# EAGLE board EKG-PreAmp (EAGLE 5.09)
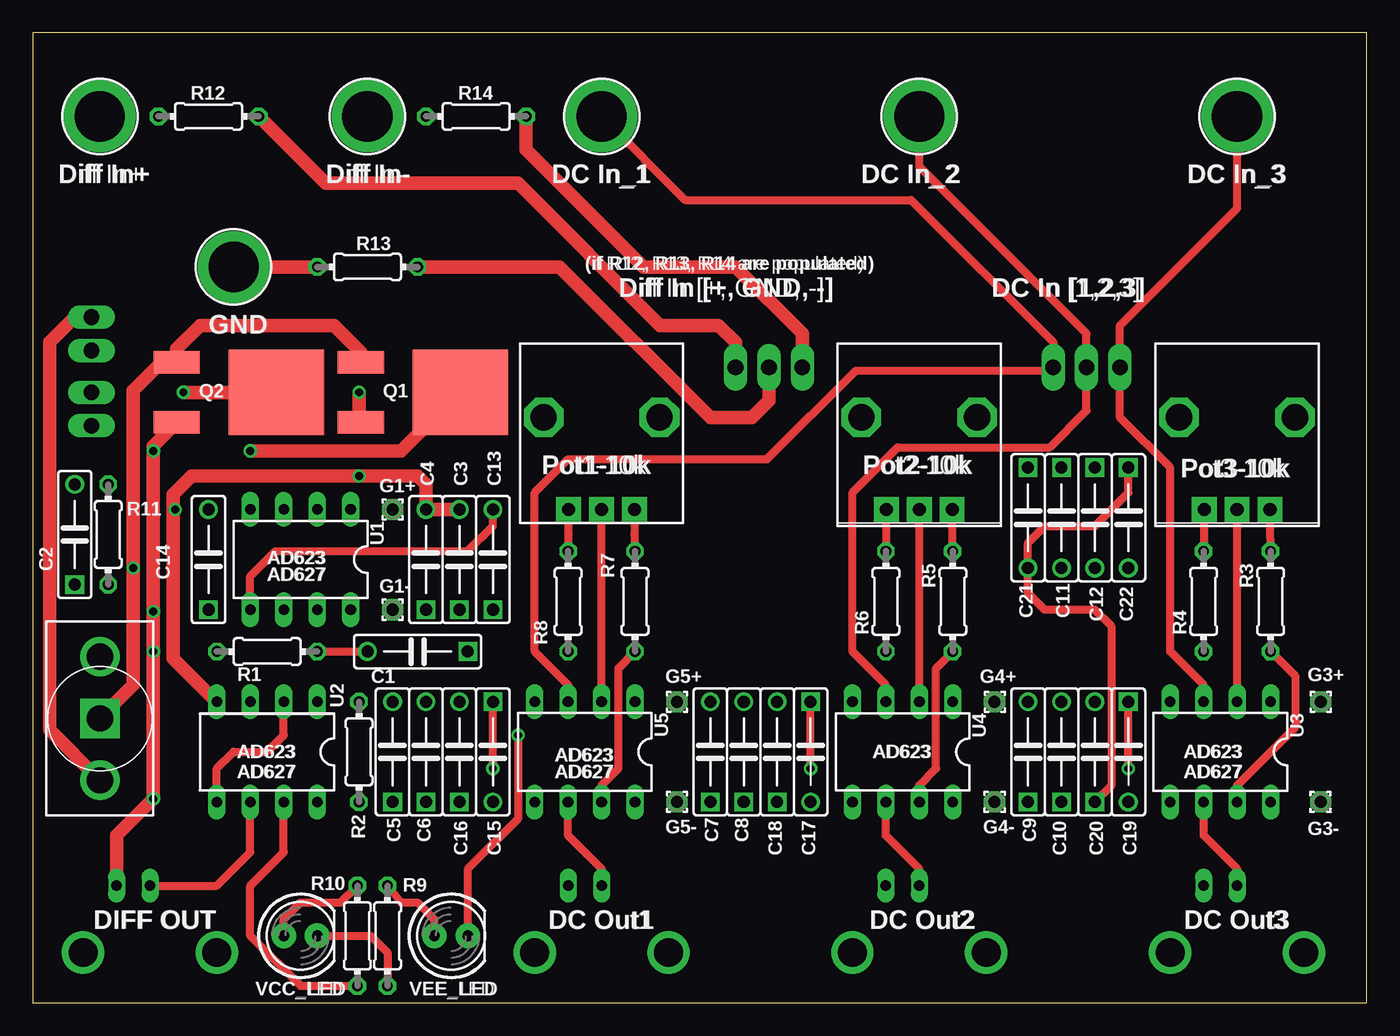
[diagram p0: board, top side]
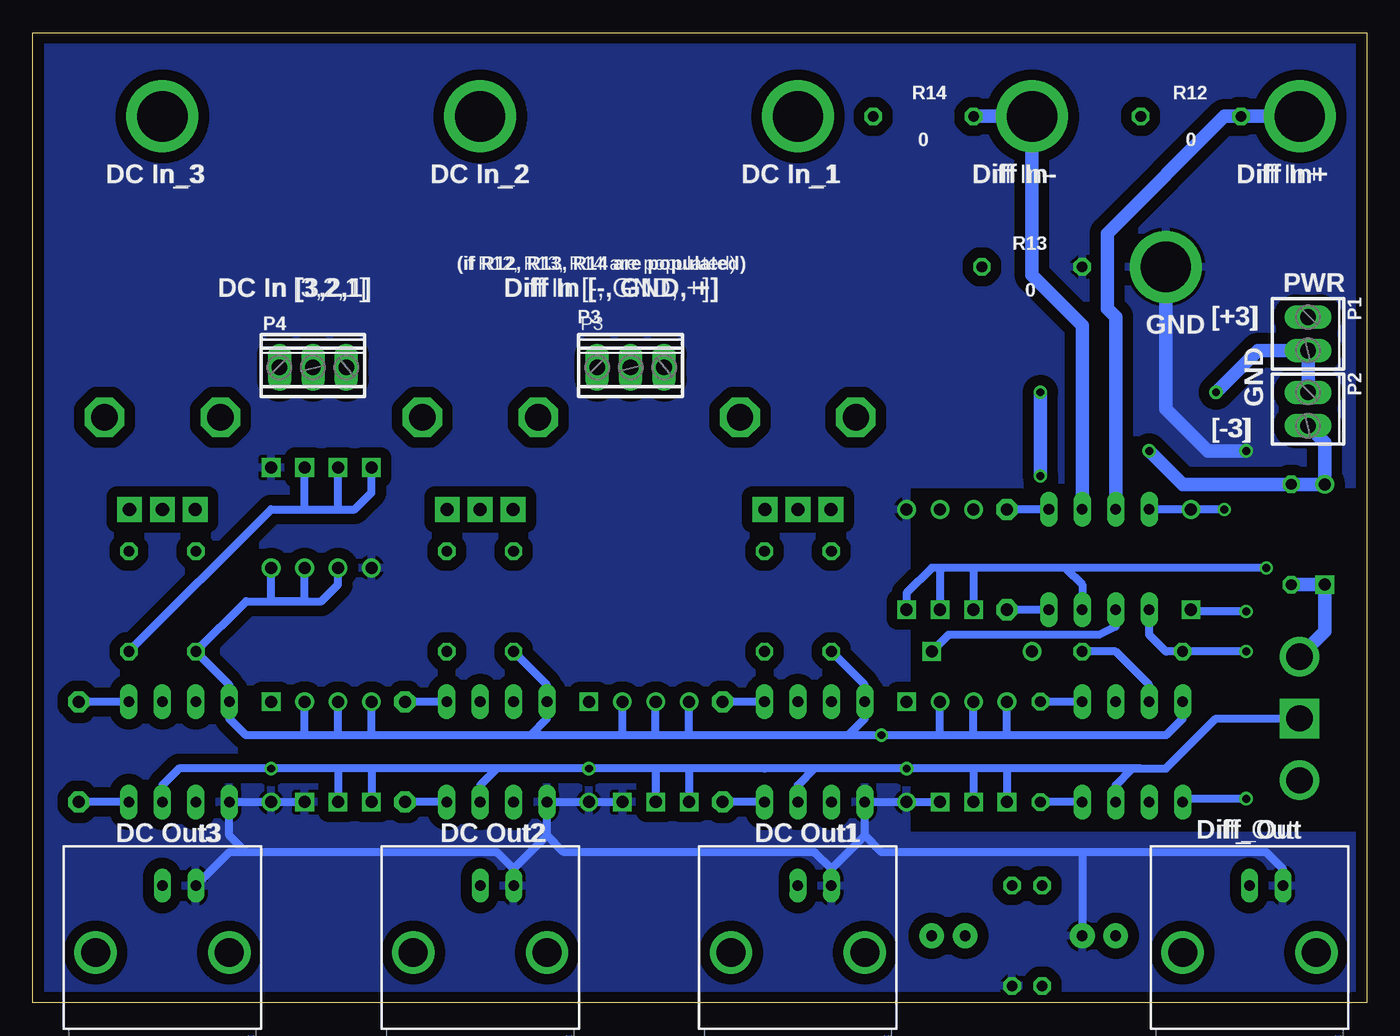
[diagram p1: board, bottom side, seen from below]

Size 101.27 x 73.65 mm. Coordinates in mm from the lower left corner, seen from the top.
Outline: 0,0 101.27,0 101.27,73.65 0,73.65 0,0
Copper layers (1*16): Top 0.0356mm / dielectric 1.5011mm / Bottom 0.0356mm
Design rules "std4pcb": minimum track width 6mil, minimum drill 10mil, track to track 8mil, track to pad 8mil, pad to pad 8mil, via to via 8mil, smd to smd 8mil, copper to edge 15mil, drill to drill 10mil, minimum pad ring 10mil, minimum via ring 8mil, stop-mask expansion 4mil, vias tented up to drill 0mil, thermal gap 10mil

## Footprints (pad centres in the part's own frame; a part is rotated, then mirrored left to right if it is on the bottom)
BNC = drill 2.2 round: 3 -5.08,5.08; 4 5.08,5.08 | drill 0.8 long: GND -2.54,0; S 0,0
BANANA_CONN = drill 3.81 pad 5.461 round: P$1 0,0
C-AXIAL = drill 0.914 square: 1 -3.81,0 | drill 0.914 round: 2 3.81,0
1,6/0,9 = drill 0.914 pad 1.6 octagon: 1 0,0
2POL254 = drill 1.2 long: 1 -1.27,0; 2 1.27,0
3POL254 = drill 1.2 long: 1 -2.54,0; 2 0,0; 3 2.54,0
ALPS_POT = drill 1 pad 1.88 square: P$1 7,-2.5; P$2 7,0; P$3 7,2.5 | drill 2 octagon: P$4 0,-4.4; P$5 0,4.4
TO-252 = smd 6.5 x 7.25: D 0,7.05 | smd 1.7 x 3.5: G -2.286,-0.5; S 2.286,-0.5
R-AXIAL = drill 0.813 octagon: 1 -2.54,0; 2 5.08,0
NKK-M2012SS1G03 = drill 2 square: P$1 0,0 | drill 2 round: P$2 -4.699,0; P$3 4.699,0
DIL08 = drill 0.813 long: 1 -3.81,-3.81; 2 -1.27,-3.81; 3 1.27,-3.81; 4 3.81,-3.81; 5 3.81,3.81; 6 1.27,3.81; 7 -1.27,3.81; 8 -3.81,3.81
LED5MM = drill 0.813 pad 1.88 round: A -1.27,0; K 1.27,0

## Placement (x,y rotation side)
BNC1  BNCPTH  [BNC]  8.89,8.89 180 bottom
BNC2  BNCPTH  [BNC]  91.44,8.89 180 bottom
BNC3  BNCPTH  [BNC]  67.31,8.89 180 bottom
BNC4  BNCPTH  [BNC]  43.18,8.89 180 bottom
BP1  BANANA_CONN  [BANANA_CONN]  25.4,67.31 0 top
BP2  BANANA_CONN  [BANANA_CONN]  5.08,67.31 0 top
BP3  BANANA_CONN  [BANANA_CONN]  15.24,55.88 0 top
BP4  BANANA_CONN  [BANANA_CONN]  91.44,67.31 270 top
BP5  BANANA_CONN  [BANANA_CONN]  67.31,67.31 270 top
BP6  BANANA_CONN  [BANANA_CONN]  43.18,67.31 270 top
C1  >= 1uF  [C-AXIAL]  29.21,26.67 180 top
C2  DNI  [C-AXIAL]  3.17,35.56 90 top
C3  .47uF  [C-AXIAL]  32.38,33.66 90 top
C4  .1uF  [C-AXIAL]  29.84,33.66 90 top
C5  .47uF  [C-AXIAL]  27.3,19.05 90 top
C6  .1uF  [C-AXIAL]  29.84,19.05 90 top
C7  .47uF  [C-AXIAL]  51.44,19.05 90 top
C8  .1uF  [C-AXIAL]  53.98,19.05 90 top
C9  .47uF  [C-AXIAL]  75.56,19.05 90 top
C10  .1uF  [C-AXIAL]  78.11,19.05 90 top
C11  .47uF  [C-AXIAL]  78.11,36.83 270 top
C12  .1uF  [C-AXIAL]  80.64,36.83 270 top
C13  .1uF  [C-AXIAL]  34.92,33.66 90 top
C14  .47uF  [C-AXIAL]  13.34,33.66 90 top
C15  .47uF  [C-AXIAL]  34.92,19.05 270 top
C16  .1uF  [C-AXIAL]  32.38,19.05 90 top
C17  .1uF  [C-AXIAL]  59.05,19.05 270 top
C18  .47uF  [C-AXIAL]  56.52,19.05 90 top
C19  .47uF  [C-AXIAL]  83.19,19.05 270 top
C20  1uF  [C-AXIAL]  80.64,19.05 90 top
C21  .1uF  [C-AXIAL]  75.56,36.83 270 top
C22  1uF  [C-AXIAL]  83.19,36.83 270 top
G1+  [1,6/0,9]  27.3,37.47 270 top
G1-  [1,6/0,9]  27.3,29.84 270 top
G3+  [1,6/0,9]  97.79,22.86 270 top
G3-  [1,6/0,9]  97.79,15.24 270 top
G4+  [1,6/0,9]  73.03,22.86 270 top
G4-  [1,6/0,9]  73.03,15.24 270 top
G5+  [1,6/0,9]  48.9,22.86 270 top
G5-  [1,6/0,9]  48.9,15.24 270 top
P1  [2POL254]  4.45,50.8 270 bottom
P2  [2POL254]  4.45,45.09 270 bottom
P3  [3POL254]  55.88,48.26 0 bottom
P4  [3POL254]  80.01,48.26 0 bottom
POT1  10k  [ALPS_POT]  91.44,44.45 270 top
POT2  10k  [ALPS_POT]  67.31,44.45 270 top
POT3  10k  [ALPS_POT]  43.18,44.45 270 top
Q1  AOD4102  [TO-252]  25.4,46.35 270 top
Q2  AOD4102  [TO-252]  11.43,46.35 270 top
R1  2M  [R-AXIAL]  16.51,26.67 0 top
R2  TBD  [R-AXIAL]  24.77,17.78 90 top
R3  43k  [R-AXIAL]  93.98,31.75 270 top
R4  43k  [R-AXIAL]  88.9,29.21 90 top
R5  43k  [R-AXIAL]  69.85,31.75 270 top
R6  43k  [R-AXIAL]  64.77,29.21 90 top
R7  43k  [R-AXIAL]  45.72,31.75 270 top
R8  43k  [R-AXIAL]  40.64,29.21 90 top
R9  300  [R-AXIAL]  26.92,6.35 270 top
R10  300  [R-AXIAL]  24.64,6.35 270 top
R11  DNI  [R-AXIAL]  5.71,36.83 270 top
R12  0  [R-AXIAL]  14.61,67.31 180 top
R13  0  [R-AXIAL]  26.67,55.88 180 top
R14  0  [R-AXIAL]  34.92,67.31 180 top
S2  [NKK-M2012SS1G03]  5.08,21.59 90 top
U1  AD621  [DIL08]  20.32,33.66 180 top
U2  AD621  [DIL08]  17.78,19.05 180 top
U3  AD621  [DIL08]  90.17,19.05 180 top
U4  AD621  [DIL08]  66.04,19.05 180 top
U5  AD621  [DIL08]  41.91,19.05 180 top
VCC_LED  [LED5MM]  20.32,5.08 0 top
VEE_LED  [LED5MM]  31.75,5.08 0 top

## Library data of the parts
BNC1-BNC4 BP1-BP6 C1-C22 G1+ G1- G3+ G3- G4+ G4- G5+ G5- P1-P4 POT1-POT3 Q1 Q2 R1-R14 S2 U1-U5 VCC_LED VEE_LED = parts

## Nets
+3V: P1.1 S2.P$2
-3V: C2.2 P2.2 Q1.D R11.1
DC1: BP4.P$1 P4.1 U3.3
DC2: BP5.P$1 P4.2 U4.3
DC3: BP6.P$1 P4.3 U5.3
DIFF+: BP2.P$1 R12.2 U1.3
DIFF-: BP1.P$1 R14.2 U1.2
GND: BNC1.GND BNC2.GND BNC3.GND BNC4.GND BP3.P$1 C13.2 C14.1 C15.2 C16.1 C17.2 C18.1 C19.2 C20.1 C21.2 C22.1 Q2.S R1.1 R9.2 R13.2 U1.5 U2.2 U2.5 U3.5 U4.5 U5.5 VCC_LED.K
N$1: P3.3 R12.1
N$2: R2.1 U2.8
N$3: G1+.1 U1.1
N$4: G1-.1 U1.8
N$5: P3.2 R13.1
N$6: P3.1 R14.1
N$7: G3+.1 U3.1
N$8: G3-.1 U3.8
N$10: POT1.P$3 R3.1
N$11: POT1.P$1 R4.2
N$12: POT1.P$2 U3.2
N$13: BNC2.S U3.6
N$14: C1.1 U1.6
N$15: C2.1 R11.2 S2.P$3
N$18: R9.1 VEE_LED.A
N$19: BNC1.S U2.6
N$20: R10.1 VCC_LED.A
N$22: G4+.1 U4.1
N$23: G4-.1 U4.8
N$24: POT2.P$3 R5.1
N$25: POT2.P$1 R6.2
N$27: POT2.P$2 U4.2
N$28: BNC3.S U4.6
N$31: G5+.1 U5.1
N$32: G5-.1 U5.8
N$33: POT3.P$3 R7.1
N$34: POT3.P$1 R8.2
N$36: POT3.P$2 U5.2
N$37: BNC4.S U5.6
N$38: C1.2 R1.2 U2.3
NEUTRAL: P1.2 P2.1 Q2.D
R97: R2.2 U2.1
VCC: C3.1 C4.1 C5.1 C6.1 C7.1 C8.1 C9.1 C10.1 C11.1 C12.1 C13.1 C15.1 C17.1 C19.1 C21.1 Q1.G Q2.G R3.2 R5.2 R7.2 R10.2 S2.P$1 U1.7 U2.7 U3.7 U4.7 U5.7
VEE: C3.2 C4.2 C5.2 C6.2 C7.2 C8.2 C9.2 C10.2 C11.2 C12.2 C14.2 C16.2 C18.2 C20.2 C22.2 Q1.S R4.1 R6.1 R8.1 U1.4 U2.4 U3.4 U4.4 U5.4 VEE_LED.K

## Tracks (layer width: path | path; a pad name or v marks a point on that pad's centre or on a via)
+3V
  Top 1.016: P1.1 3.17,52.07 1.27,50.16 1.27,20.7 S2.P$2
-3V  (via drill 0.6)
  Top 1.016: Q1.D 32.38,46.35 27.94,41.91 v16.51,41.91
  Bottom 1.016: P2.2 3.17,42.55 C2.2 R11.1 13.97,39.37 v16.51,41.91
DC1
  Top 0.61: U3.3 88.9,24.13 86.36,26.67 86.36,40.64 82.55,44.45 P4.1 82.55,51.44 91.44,60.33 BP4.P$1
DC2
  Top 0.61: U4.3 64.77,24.13 62.23,26.67 62.23,38.73 65.66,42.16 77.22,42.16 80.01,44.96 P4.2 80.01,50.8 67.31,63.5 BP5.P$1
DC3
  Top 0.61: U5.3 40.64,24.13 38.1,26.67 38.1,38.73 40.64,41.27 55.75,41.27 62.48,48.01 77.22,48.01 P4.3 77.47,50.16 66.67,60.96 49.53,60.96 BP6.P$1
DIFF+
  Bottom 1.016: BP2.P$1 R12.2 10.79,67.31 19.68,58.42 19.68,52.7 19.05,52.07 U1.3
DIFF-
  Bottom 1.016: U1.2 21.59,51.44 25.4,55.24 BP1.P$1 R14.2
GND  (via drill 0.6)
  Top 0.61: VCC_LED.K 25.65,5.08 26.92,3.81 R9.2 | U2.2 19.05,20.32 17.78,19.05 15.24,19.05 13.97,17.78 U2.5 | U1.5 16.51,32.38 18.41,34.29 33.02,34.29 34.92,36.2 C13.2 | C22.1 83.19,38.73 80.64,36.2 76.83,36.2 75.56,34.92 C21.2 75.56,31.11 76.83,29.84 80.64,29.84 81.92,28.57 81.92,16.51 C20.1
  Top 1.016: Q2.S 10.41,44.07 | Q2.S 11.18,44.07 11.43,43.81 | BNC1.GND 6.35,12.7 v9.14,15.49 v9.14,26.67 v9.14,29.72 v9.14,41.91 9.14,42.28 Q2.S | BP3.P$1 R13.2
  Bottom 0.61: 64.77,10.16 BNC3.GND | 64.77,10.16 66.04,11.43 85.09,11.43 | 85.09,11.43 86.36,12.7 U3.5 C19.2 C20.1 | 40.64,10.16 41.91,11.43 60.96,11.43 62.23,12.7 | 62.23,12.7 U4.5 C17.2 C18.1 | U1.5 16.51,27.94 15.24,26.67 R1.1 v9.14,26.67 | BNC2.GND 86.36,11.43 85.09,11.43 | 62.23,12.7 64.77,10.16 | 40.64,10.16 BNC4.GND | 38.1,12.7 40.64,10.16 | 38.1,12.7 36.83,11.43 21.59,11.43 | BNC1.GND 6.35,10.16 7.62,11.43 21.59,11.43 | 21.59,11.43 VCC_LED.K | v9.14,29.72 13.21,29.72 C14.1 | 38.1,12.7 U5.5 C15.2 C16.1 | v9.14,15.49 13.72,15.49 U2.5
  Bottom 1.016: v9.14,41.91 12.06,41.91 15.24,45.09 BP3.P$1
  pour Bottom (isolate 0.813): 0.64,0.64 100.33,0.64 100.33,73.03 0.64,73.03 0.64,53.98 0.64,39.37 34.92,39.37 34.92,12.7 0.64,12.7
N$1
  Top 1.016: R12.1 22.23,62.23 36.83,62.23 47.62,51.44 52.07,51.44 53.34,50.16 P3.3
N$2
  Bottom 0.61: U2.8 R2.1
N$3
  Bottom 0.61: U1.1 G1+.1
N$4
  Bottom 0.61: U1.8 G1-.1
N$5
  Top 1.016: R13.1 40.01,55.88 51.44,44.45 54.61,44.45 55.88,45.72 P3.2
N$6
  Top 1.016: R14.1 37.47,64.77 46.35,55.88 53.34,55.88 58.42,50.8 P3.1
N$7
  Bottom 0.61: U3.1 G3+.1
N$8
  Bottom 0.61: U3.8 G3-.1
N$10
  Top 0.61: POT1.P$3 93.94,35.56 R3.1
N$11
  Top 0.61: POT1.P$1 88.94,35.56 R4.2
N$12
  Top 0.61: U3.2 POT1.P$2
N$13
  Top 0.61: BNC2.S 91.44,10.16 88.9,12.7 U3.6
N$14
  Bottom 0.61: U1.6 19.05,28.57 20.32,27.94 31.75,27.94 C1.1
N$15
  Bottom 1.016: R11.2 C2.1 3.17,28.19 S2.P$3
N$18
  Top 0.61: R9.1 27.94,7.62 29.21,7.62 30.48,6.35 VEE_LED.A
N$19
  Top 0.61: BNC1.S 13.97,8.89 16.51,11.43 U2.6
N$20
  Top 0.61: VCC_LED.A 19.05,6.35 20.32,7.62 23.37,7.62 R10.1
N$22
  Bottom 0.61: U4.1 G4+.1
N$23
  Bottom 0.61: U4.8 G4-.1
N$24
  Top 0.61: POT2.P$3 69.81,35.56 R5.1
N$25
  Top 0.61: POT2.P$1 64.81,35.56 R6.2
N$27
  Top 0.61: U4.2 POT2.P$2
N$28
  Top 0.61: U4.6 64.77,12.7 67.31,10.16 BNC3.S
N$31
  Bottom 0.61: U5.1 G5+.1
N$32
  Bottom 0.61: U5.8 G5-.1
N$33
  Top 0.61: POT3.P$3 45.68,35.56 R7.1
N$34
  Top 0.61: POT3.P$1 40.68,35.56 R8.2
N$36
  Top 0.61: U5.2 POT3.P$2
N$37
  Top 0.61: U5.6 40.64,12.7 43.18,10.16 BNC4.S
N$38
  Top 0.61: R1.2 C1.2
  Bottom 0.61: R1.2 19.05,26.67 16.51,24.13 U2.3
NEUTRAL  (via drill 0.6)
  Top 1.016: v11.43,46.35 Q2.D
  Bottom 1.016: P2.1 P1.2 8.26,49.53 v11.43,46.35
R97
  Bottom 0.61: U2.1 R2.2
VCC  (via drill 0.6)
  Top 0.61: U3.7 91.44,16.51 95.89,20.95 95.89,24.77 R3.2 | R10.2 20.32,1.27 16.51,5.08 16.51,8.89 19.05,11.43 U2.7 | R7.2 44.45,25.4 44.45,17.78 43.18,16.51 U5.7 | U4.7 67.31,16.51 68.58,17.78 68.58,25.4 R5.2 | v34.92,17.78 C15.1 | v59.05,17.78 C17.1 | v83.19,17.78 C19.1
  Top 1.016: Q1.G 24.9,49.4 22.86,51.44 12.7,51.44 10.93,49.66 Q2.G 9.78,48.64 7.62,46.48 v7.62,33.02 7.62,24.13 S2.P$1
  Bottom 0.406: 45.72,17.78 44.45,17.78
  Bottom 0.61: U3.7 91.44,16.51 90.17,17.78 v83.19,17.78 78.11,17.78 | 75.56,17.78 78.11,17.78 | 27.3,17.78 29.84,17.78 | 29.84,17.78 v34.92,17.78 41.91,17.78 | 41.91,17.78 45.72,17.78 51.44,17.78 | 51.44,17.78 53.98,17.78 | 53.98,17.78 v59.05,17.78 66.04,17.78 | 66.04,17.78 75.56,17.78 | U5.7 43.18,16.51 41.91,17.78 | U4.7 67.31,16.51 66.04,17.78 | 17.14,17.78 17.78,17.78 19.05,16.51 U2.7 | 17.14,17.78 15.24,17.78 11.43,21.59 S2.P$1 | 17.14,17.78 27.3,17.78 | 27.3,17.78 C5.1 | 29.84,17.78 C6.1 | 51.44,17.78 C7.1 | 53.98,17.78 C8.1 | 75.56,17.78 C9.1 | 78.11,17.78 C10.1 | 32.38,33.02 C3.1 | 29.84,33.02 32.38,33.02 | 29.84,33.02 C4.1 | 22.86,33.02 29.84,33.02 | 22.86,33.02 21.59,31.75 U1.7 | v7.62,33.02 22.86,33.02 | 32.38,33.02 33.02,33.02 34.92,31.11 C13.1 | 80.64,37.47 78.11,37.47 | 78.11,37.47 76.83,37.47 75.56,38.73 C21.1 | 78.11,37.47 C11.1 | 80.64,37.47 C12.1 | 80.64,37.47 83.19,37.47 R3.2
VEE  (via drill 0.6)
  Top 0.61: 24.77,44.2 Q1.S | 10.79,38.73 v10.79,37.47 | VEE_LED.K 33.02,10.16 36.83,13.97 v36.83,20.32
  Top 1.016: v24.77,46.35 24.77,44.2 | U2.4 10.67,26.16 10.67,38.61 10.79,38.73 12.06,40.01 v24.77,40.01 29.21,40.01 29.84,39.37 C4.2 C3.2
  Bottom 0.61: 63.5,20.32 75.56,20.32 | 75.56,20.32 78.11,20.32 | 27.3,20.32 29.84,20.32 | 29.84,20.32 32.38,20.32 | 32.38,20.32 v36.83,20.32 39.37,20.32 | 63.5,20.32 62.23,21.59 U4.4 62.23,24.13 R6.1 | 39.37,20.32 51.44,20.32 | 51.44,20.32 53.98,20.32 | 53.98,20.32 56.52,20.32 | 56.52,20.32 63.5,20.32 | 78.11,20.32 80.64,20.32 | 80.64,20.32 85.09,20.32 86.36,21.59 U3.4 86.36,24.13 R4.1 85.09,30.48 80.64,30.48 | R8.1 38.1,24.13 U5.4 38.1,21.59 39.37,20.32 | 27.3,20.32 15.24,20.32 13.97,21.59 U2.4 | v10.79,37.47 C14.2 U1.4 | 27.3,20.32 C5.2 | 29.84,20.32 C6.2 | 32.38,20.32 C16.2 | 51.44,20.32 C7.2 | 53.98,20.32 C8.2 | 56.52,20.32 C18.2 | 75.56,20.32 C9.2 | 78.11,20.32 C10.2 | 80.64,20.32 C20.2 | C11.2 78.11,31.75 79.38,30.48 80.64,30.48 | 80.64,30.48 C12.2 | C22.2 83.19,30.48 80.64,30.48
  Bottom 1.016: v24.77,40.01 v24.77,46.35

## Text on the board
tNames: Diff In+ | Diff In- | DC In_1 | DC In_2 | DC In_3 | (if R12, R13, R14 are populated) | Diff In [+, GND, -] | DC In [1,2,3] | GND | Pot1-10k | Pot2-10k | Pot3-10k | AD623 | AD627 | AD623 | AD623 | AD623 | AD623 | AD627 | AD627 | AD627 | DIFF OUT | DC Out1 | DC Out2 | DC Out3
bNames: R12 | R14 | 0 | 0 | Diff In+ | Diff In- | DC In_1 | DC In_2 | DC In_3 | R13 | (if R12, R13, R14 are populated) | PWR | 0 | Diff In [-, GND, +] | DC In [3,2,1] | [+3] | GND | GND | [-3] | Diff_Out | DC Out1 | DC Out2 | DC Out3
_tnames: R12 | R14 | Diff In+ | Diff In- | DC In_1 | DC In_2 | DC In_3 | R13 | (if R12, R13, R14 are populated) | Diff In [+, GND, -] | DC In [1,2,3] | GND | Q2 | Q1 | Pot1-10k | Pot2-10k | Pot3-10k | G1+ | C4 | C3 | C13 | R11 | U1 | C2 | AD623 | C14 | AD627 | R7 | G1- | R5 | R3 | C21 | C11 | C12 | C22 | R6 | R4 | R8 | R1 | U2 | C1 | G5+ | G4+ | G3+ | U4 | U3 | U5 | AD623 | AD623 | AD623 | AD623 | AD627 | AD627 | AD627 | G5- | G4- | G3- | R2 | C5 | C6 | C7 | C8 | C9 | C16 | C15 | C18 | C17 | C10 | C20 | C19 | R10 | R9 | DIFF OUT | DC Out1 | DC Out2 | DC Out3 | VCC_LED | VEE_LED
_bnames: R12 | R14 | 0 | 0 | Diff In+ | Diff In- | DC In_1 | DC In_2 | DC In_3 | R13 | (if R12, R13, R14 are populated) | P1 | PWR | 0 | Diff In [-, GND, +] | DC In [3,2,1] | P3 | [+3] | GND | P4 | GND | P2 | [-3] | Diff_Out | DC Out1 | DC Out2 | DC Out3
_tvalues: 0 | 0 | 0 | .1uF | .47uF | .1uF | 1uF | 1k | 1uF | AD621 | .47uF | 43k | 43k | 43k | 43k | 43k | 43k | 2M | >= 1uF | .47uF | .1uF | .47uF | .1uF | .47uF | .1uF | 1uF | .47uF | AD621 | AD621 | AD621 | AD621 | 0 | 300 | 300
_bvalues: BNCPTH | BNCPTH | BNCPTH | BNCPTH